# Altium PCB RX_BA_v4.PcbDoc
Units mm, origin at the board's own origin, x right, y up, seen from the top; angles counter-clockwise.
Board outline 80 x 60 mm, 2 copper layers (Top Layer, Bottom Layer), stack 1.671 mm thick; 175 components, 81 nets, 394 pads, 12 vias.
Unrouted connection lines stored in the file: 2.
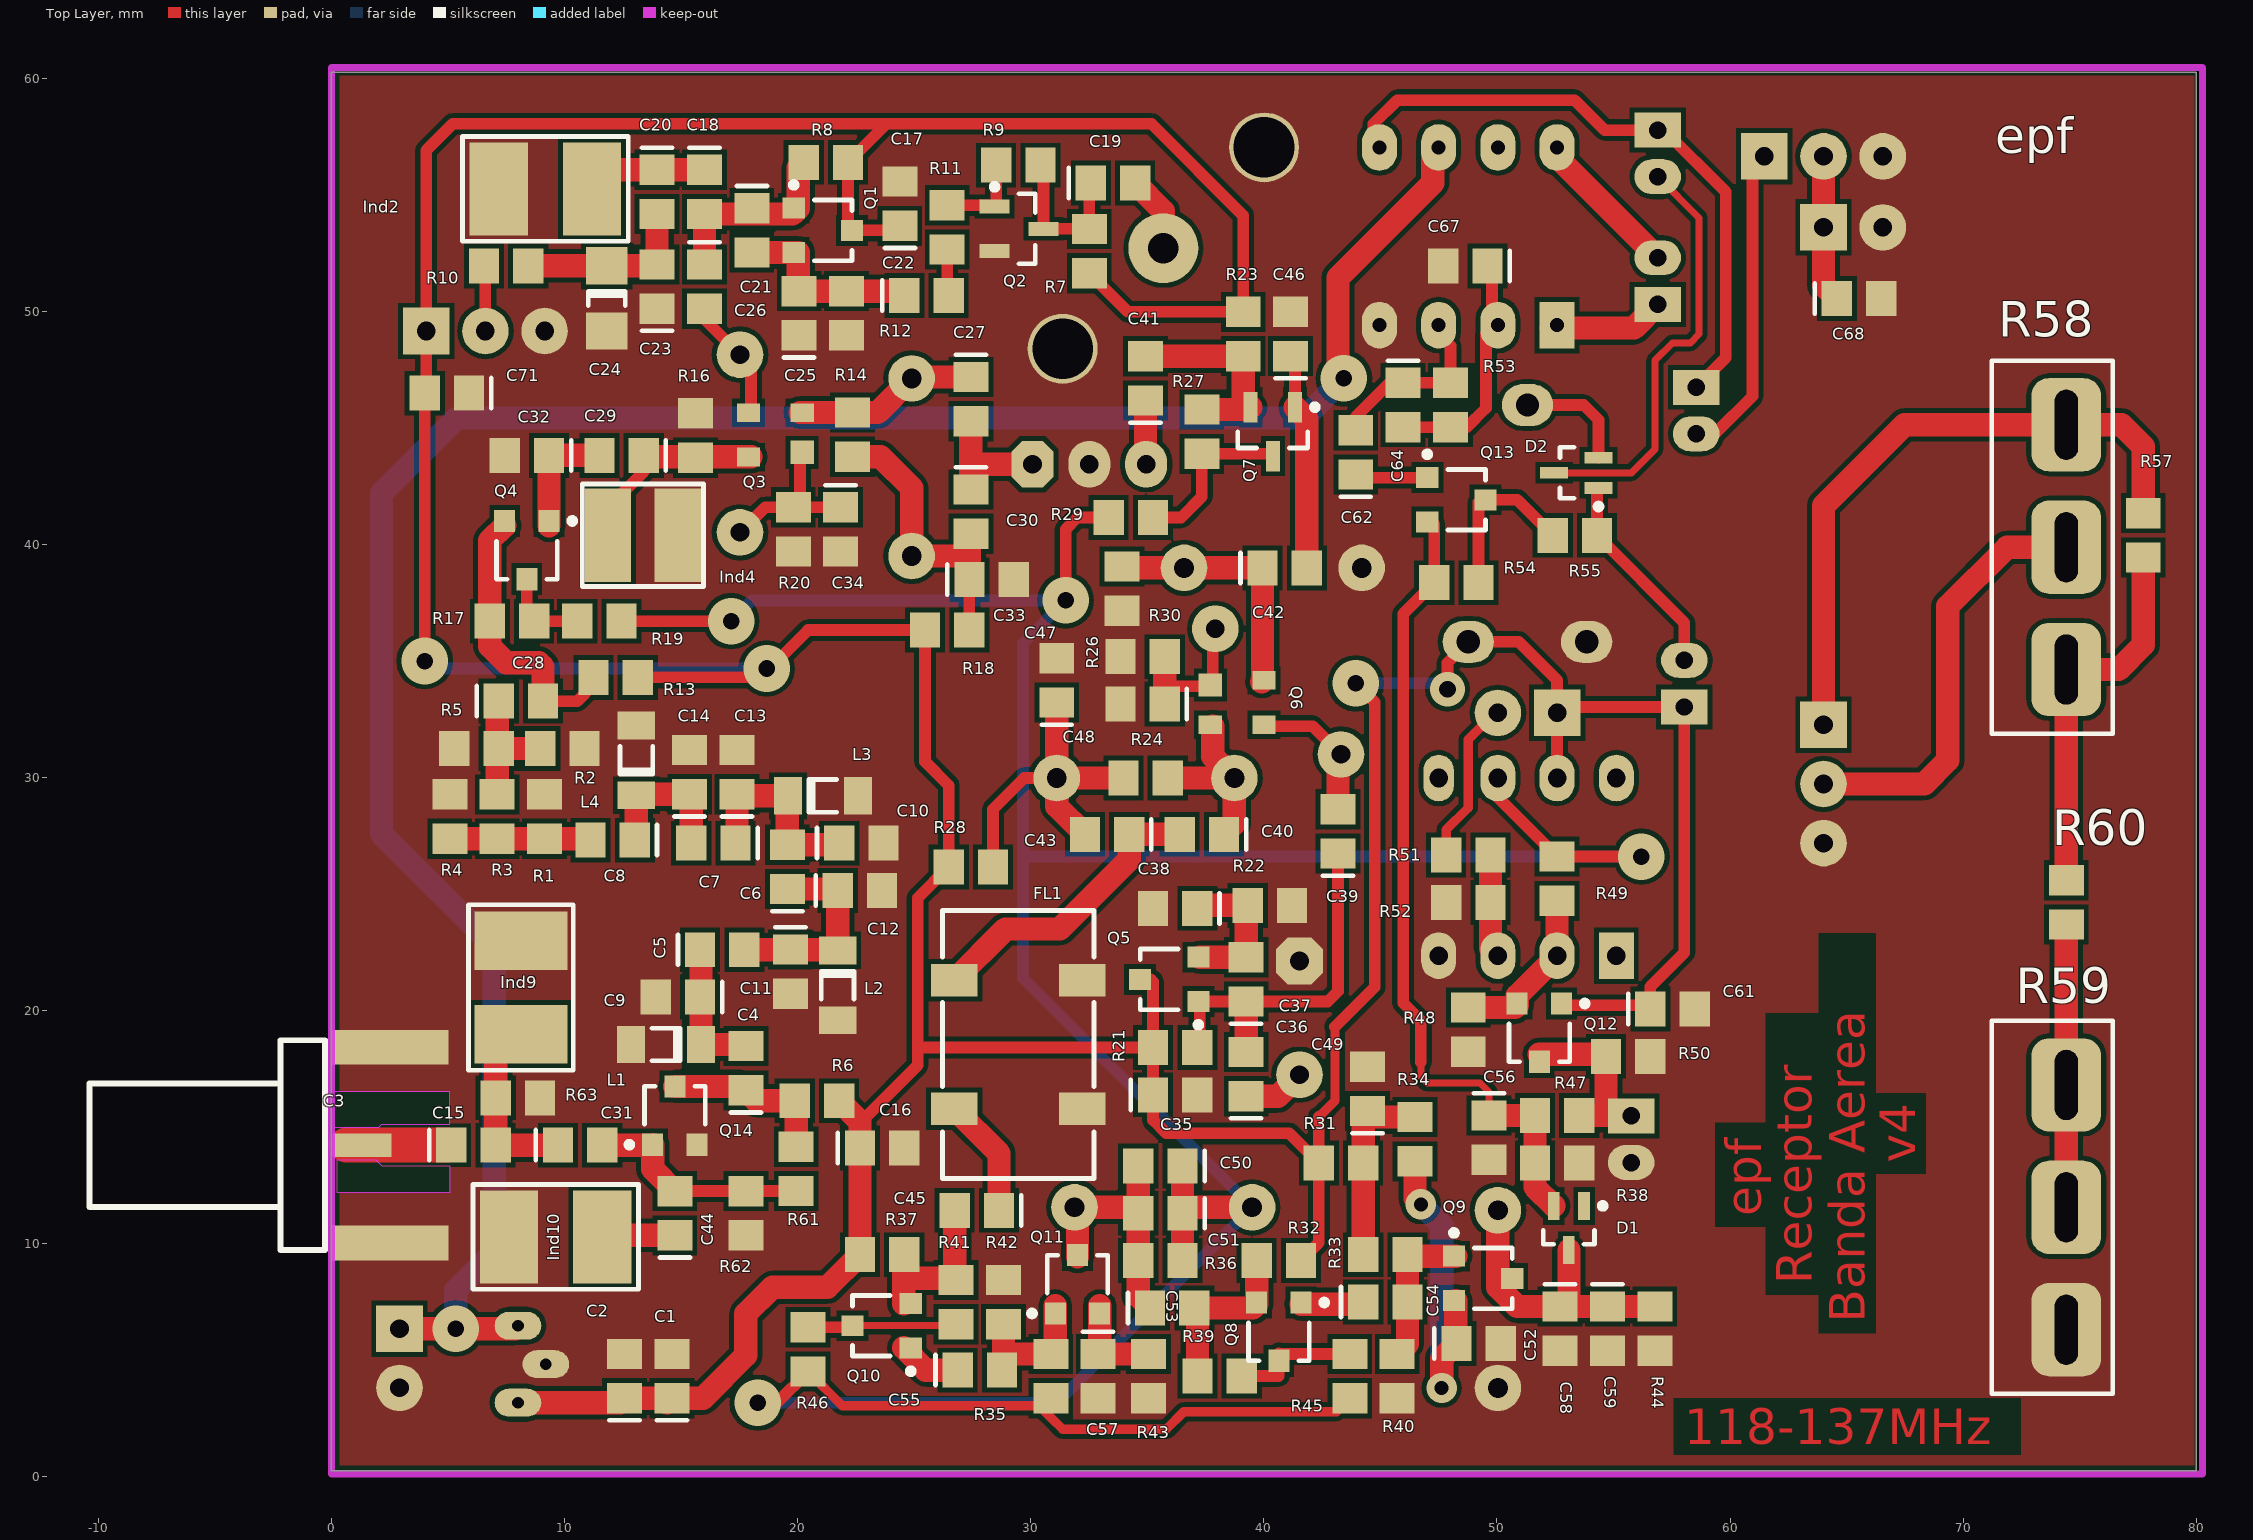
[diagram p0: Top Layer view]
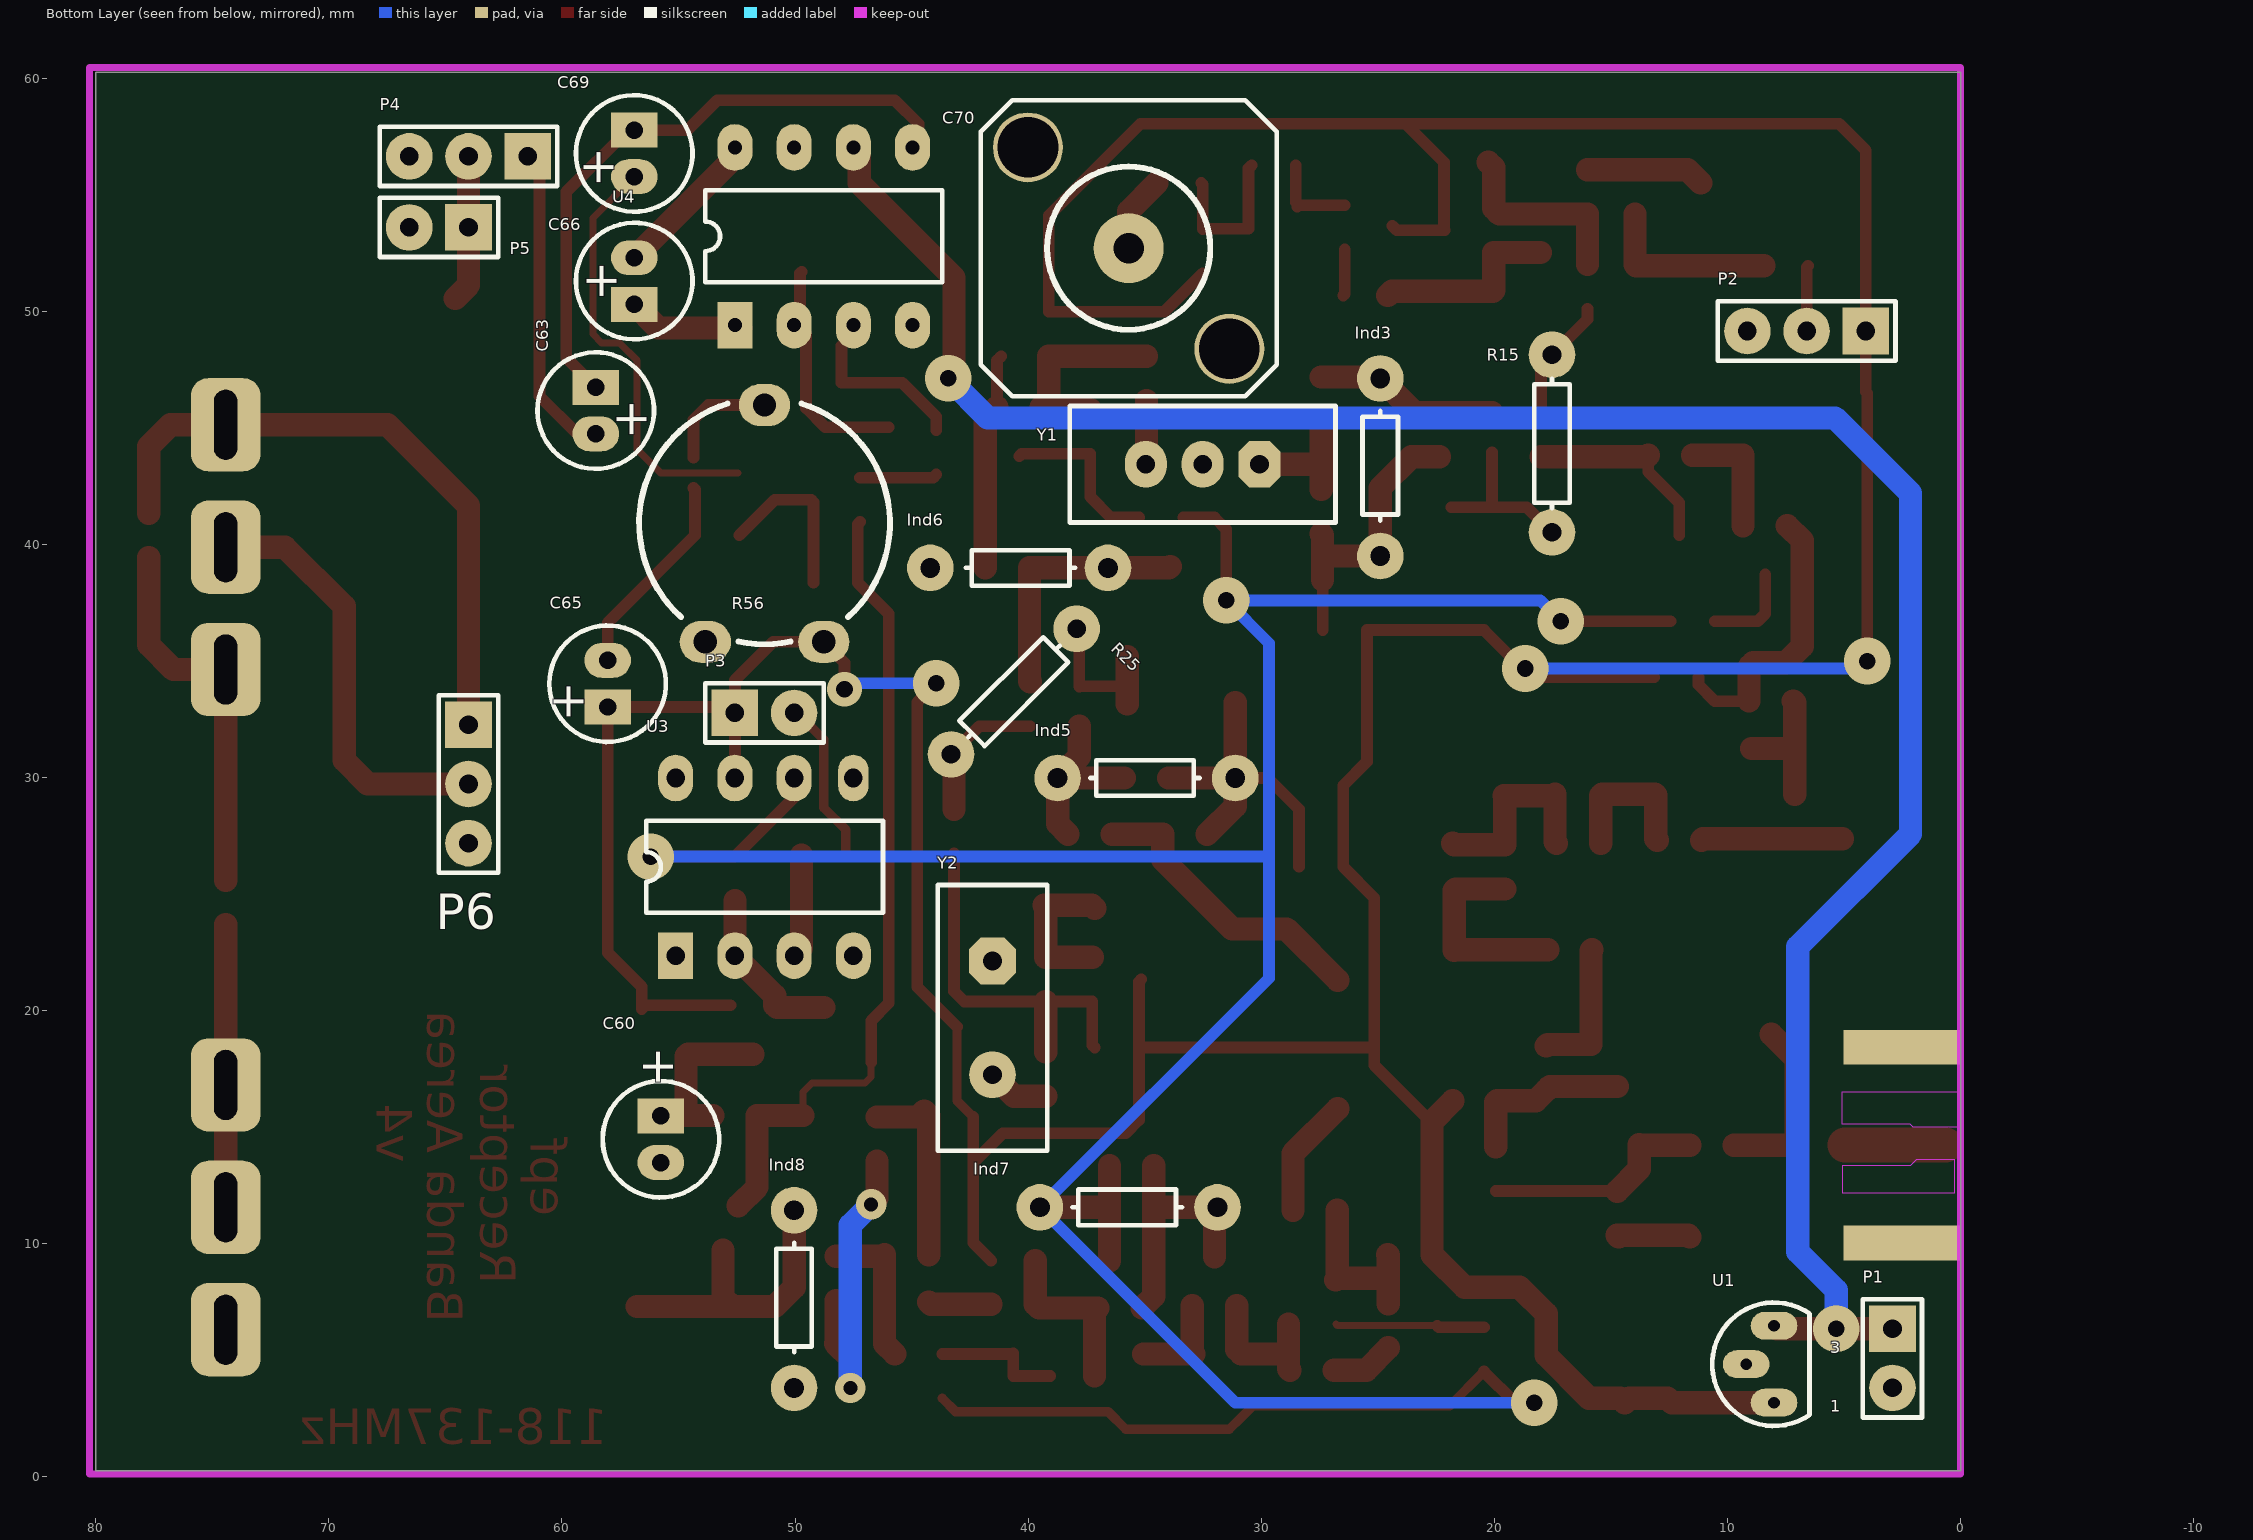
[diagram p1: Bottom Layer view, seen from below]

## Layer stack, top to bottom
Top Layer: signal copper 0.0356
Dielectric: core 1.6, FR-4, Dk 4.8
Bottom Layer: signal copper 0.0356

## Board outline
0,0.254 80,0.254 80,60.254 0,60.254

## Design rules (kind name [scope] priority, off if disabled: settings)
Clearance [All] p1: gap=0.2
ComponentClearance ComponentClearance_2 [OnMechanical] p1: gap=0 collisioncheckmode=3 verticalgap=0 showdistances=TRUE
ComponentClearance ComponentClearance_1 [(OnLayer('Bottom Layer'))] p2: gap=0 collisioncheckmode=3 verticalgap=0 showdistances=TRUE
ComponentClearance [All] p3: gap=0.1 collisioncheckmode=3 verticalgap=0.254 showdistances=TRUE
HoleSize [All] p1: absolutevalues=TRUE maxlimit=5 minlimit=0.025 maxpercent=80.000 minpercent=20.000
PolygonConnect [All] p1: connectstyle=Direct reliefconductorwidth=0.254 reliefentries=4 polygonreliefangle="90 Angle"
RoomDefinition Control_Freq [InComponentClass('Control_Freq')] p1: confinementstyle=ConfineIn formatcopy=TRUE lockcomponents=TRUE outline 61.849,-8.509 141.097,-8.509 141.097,57.404 61.849,57.404
RoomDefinition Mezclador2 [InComponentClass('Mezclador2')] p2: confinementstyle=ConfineIn formatcopy=TRUE lockcomponents=FALSE outline 24.384,10.033 45.72,10.033 45.72,51.689 24.384,51.689
RoomDefinition Mezclador1 [InComponentClass('Mezclador1')] p3: confinementstyle=ConfineIn formatcopy=TRUE lockcomponents=FALSE outline -0.127,29.972 47.117,29.972 47.117,61.468 -0.127,61.468
RoomDefinition FiltroRF [InComponentClass('FiltroRF')] p4: confinementstyle=ConfineIn formatcopy=TRUE lockcomponents=FALSE outline 27.178,35.306 3.429,35.306 3.429,10.541 27.178,10.541
RoomDefinition AmpliRF [InComponentClass('AmpliRF')] p5: confinementstyle=ConfineIn formatcopy=TRUE lockcomponents=FALSE outline 30.353,-0.254 30.353,29.21 -11.557,29.21 -11.557,-0.254
RoomDefinition Ampli_FI2 [InComponentClass('Ampli_FI2')] p6: confinementstyle=ConfineIn formatcopy=TRUE lockcomponents=FALSE outline 15.621,1.016 60.071,1.016 60.071,50.419 15.621,50.419
RoomDefinition Ampli_audio [InComponentClass('Ampli_audio')] p7: confinementstyle=ConfineIn formatcopy=TRUE lockcomponents=FALSE outline 41.783,30.099 84.963,30.099 84.963,60.579 41.783,60.579
RoomDefinition Alimentacion [InComponentClass('Alimentacion')] p8: confinementstyle=ConfineIn formatcopy=TRUE lockcomponents=TRUE outline 0.889,1.524 16.256,1.524 16.256,9.271 0.889,9.271
RoutingVias [All] p1: holewidth=0.8 width=2 viastyle="Through Hole" minholewidth=0.2 minwidth=1.27 maxholewidth=1 maxwidth=3
SilkToSilkClearance [All] p1: silktosilkclearance=0.1
SilkscreenOverComponentPads [All] p1: minsilkscreentomaskgap=0
SolderMaskExpansion [All] p1: expansion=0.102
TestPointUsage [All] p1: valid=0 allowmultiple=FALSE
Testpoint [All] p1: side=15 testpointundercomponent=TRUE minsize=1.016 maxsize=2.54 preferedsize=1.524 minholesize=0 maxholesize=1.016 preferedholesize=0.813 testpointgrid=0.025 style=1023 order=0123456789
Width [All] p1: maxlimit=3 minlimit=0.2 preferedwidth=1
20 further rules are at their usual default settings.

## Classes and differential pairs
component class Mezclador2: C35 C36 C37 C38 C39 C40 C41 C42 C43 C45 C46 C47 C48 FL1 Ind5 Ind6 Q5 Q6 Q7 R21 R22 R23 R24 R25 R26 R27 R28 R29 R30 Y2
component class Mezclador1: C17 C18 C19 C20 C21 C22 C23 C24 C25 C26 C27 C29 C30 C32 C33 C34 C70 C71 Ind2 Ind3 Ind4 P2 Q1 Q2 Q3 Q4 R7 R8 R9 R10 R11 R12 R13 R14 R15 R16 R17 R18 R19 R20 Y1
component class FiltroRF: C4 C5 C6 C7 C8 C9 C10 C11 C12 C13 C14 C28 L1 L2 L3 L4 R1 R2 R3 R4 R5
component class Ampli_FI2: C49 C50 C51 C52 C53 C54 C55 C56 C57 C58 C59 C60 C61 D1 Ind7 Ind8 P3 Q8 Q9 Q10 Q11 Q12 R31 R32 R33 R34 R35 R36 R37 R38 R39 R40 R41 R42 R43 R44 R45 R46 R47 R48 R49 R50 R51 R52 U3
component class Ampli_audio: C62 C63 C64 C65 C66 C67 C68 C69 D2 P4 P5 Q13 R53 R54 R55 R56 U4
component class Alimentacion: C1 C2 P1 U1
component class Control_Freq: P6 R57 R58 R59 R60
component class AmpliRF: C3 C15 C16 C31 C44 Ind9 Ind10 Q14 R6 R61 R62 R63

## Components (designator, comment, footprint, x,y, rotation, side; value= is the part's Value field where it differs from the comment)
C1 "Cap Pol3" C0805 14.605,4.318 r90 top
C2 "Cap Pol3" C0805 12.573,4.318 r90 top
C3 "SMA" SMA1 -0.127,14.224 r90 top
C4 "Cap Pol3" C0805 17.78,17.526 r90 top
C5 "Cap Pol3" C0805 16.764,22.606 r0 top
C6 "Cap Pol3" C0805 19.558,26.162 r90 top
C7 "Cap Pol3" C0805 16.383,27.178 r180 top
C8 "Cap Pol3" C0805 12.065,27.305 r180 top
C9 "Cap Pol3" C0805 14.859,20.574 r180 top
C10 "Cap Pol3" C0805 22.733,27.178 r0 top
C11 "Cap Pol3" C0805 19.685,21.665 r270 top
C12 "Cap Pol3" C0805 22.672,25.146 r0 top
C13 "Cap Pol3" C0805 17.399,30.226 r90 top
C14 "Cap Pol3" C0805 15.367,30.226 r90 top
C15 "Cap Pol3" C0805 6.096,14.224 r0 top
C16 "Cap Pol3" C0805 23.622,14.097 r0 top
C17 "Cap Pol3" C0805 24.384,54.61 r90 top
C18 "Cap Pol3" C0805 16.002,55.118 r270 top
C19 "Cap Pol3" C0805 33.528,55.499 r0 top
C20 "Cap Pol3" C0805 13.97,55.118 r270 top
C21 "Cap Pol3" C0805 18.034,53.467 r270 top
C22 "Cap Pol3" C0805 25.527,50.673 r0 top
C23 "Cap Pol3" C0805 13.97,51.054 r90 top
C24 "Cap Semi" C1206 11.811,50.546 r270 top
C25 "Cap Pol3" C0805 20.066,49.911 r90 top
C26 "Cap Pol3" C0805 16.002,51.054 r270 top
C27 "Cap Pol3" C0805 27.432,46.228 r270 top
C28 "Cap Pol3" C0805 8.128,33.274 r0 top
C29 "Cap Pol3" C0805 12.446,43.815 r180 top
C30 "Cap Pol3" C0805 27.432,41.402 r270 top
C31 "Cap Pol3" C0805 10.668,14.224 r0 top
C32 "Cap Pol3" C0805 8.382,43.815 r180 top
C33 "Cap Pol3" C0805 28.321,38.481 r0 top
C34 "Cap Pol3" C0805 21.844,40.64 r270 top
C35 "Cap Pol3" C0805 36.195,16.383 r0 top
C36 "Cap Pol3" C0805 39.243,17.272 r90 top
C37 "Cap Pol3" C0805 39.243,21.336 r90 top
C38 "Cap Pol3" C0805 36.195,24.384 r180 top
C39 "Cap Pol3" C0805 43.18,27.686 r90 top
C40 "Cap Pol3" C0805 37.338,27.559 r180 top
C41 "Cap Pol3" C0805 34.925,47.117 r90 top
C42 "Cap Pol3" C0805 40.894,38.989 r0 top
C43 "Cap Pol3" C0805 33.274,27.559 r180 top
C44 "Cap Pol3" C0805 14.732,11.303 r90 top
C45 "Cap Pol3" C0805 27.686,11.43 r180 top
C46 "Cap Pol3" C0805 41.148,49.022 r90 top
C47 "Cap Pol3" C0805 31.115,34.163 r90 top
C48 "Cap Pol3" C0805 34.798,33.147 r180 top
C49 "Cap Pol3" C0805 44.45,16.637 r90 top
C50 "Cap Pol3" C0805 35.56,13.335 r180 top
C51 "Cap Pol3" C0805 35.56,11.303 r180 top
C52 "Cap Pol3" C0805 49.215,5.715 r0 top
C53 "Cap Pol3" C0805 36.068,7.239 r0 top
C54 "Cap Pol3" C0805 45.212,7.493 r0 top
C55 "Cap Pol3" C0805 27.813,4.572 r0 top
C56 "Cap Pol3" C0805 49.657,14.544 r270 top
C57 "Cap Pol3" C0805 32.893,4.318 r270 top
C58 "Cap Pol3" C0805 52.705,6.35 r270 top
C59 "Cap Pol3" C0805 54.737,6.35 r270 top
C60 "Cap Pol1" B 55.753,14.478 r270 bottom
C61 "Cap Pol3" C0805 57.531,20.066 r0 top
C62 "Cap Pol3" C0805 43.942,43.942 r90 top
C63 "Cap Pol1" B 58.547,45.736 r270 bottom
C64 "Cap Pol3" C0805 45.974,45.974 r270 top
C65 "Cap Pol1" B 58.039,34.02 r90 bottom
C66 "Cap Pol1" B 56.896,51.292 r90 bottom
C67 "Cap Pol3" C0805 48.641,51.943 r180 top
C68 "Cap Pol3" C0805 65.532,50.546 r0 top
C69 "Cap Pol1" B 56.896,56.769 r270 bottom
C70 "SMA_2" SMA-2HOLED 35.687,52.705 r0 bottom
C71 "Cap Pol3" C0805 4.953,46.482 r180 top
D1 "BAS70-04W" SOT323_N 53.086,10.668 r270 top
D2 "BAS70-04W" SOT323_N 53.406,43.068 r180 top
FL1 "CFWC455D" CFWC455 29.464,18.542 r0 top
Ind2 "Ind2" IND_4MM 7.176,55.245 r0 top
Ind3 "Ind2" AXIAL-0.3#1 24.892,43.307 r90 bottom
Ind4 "Ind2" IND_3MM 14.859,40.386 r180 top
Ind5 "Ind2" AXIAL-0.3#1 34.925,29.972 r0 bottom
Ind6 "Ind2" AXIAL-0.3#1 40.386,38.989 r180 bottom
Ind7 "Ind2" AXIAL-0.3#1 35.687,11.557 r0 bottom
Ind8 "Ind2" AXIAL-0.3#1 50.038,7.62 r90 bottom
Ind9 "Ind2" IND_4MM 8.128,22.987 r270 top
Ind10 "Ind2" IND_4MM 7.62,10.287 r0 top
L1 "Inductor" 3261 14.351,18.542 r180 top
L2 "Inductor" 3261 21.717,21.082 r270 top
L3 "Inductor" 3261 21.082,29.21 r0 top
L4 "Inductor" 3261 13.081,30.734 r90 top
P1 "Header 2" HDR1X2 2.921,6.35 r270 bottom
P2 "Header 3" HDR1X3 4.064,49.149 r0 bottom
P3 "Header 2" HDR1X2 52.578,32.766 r180 bottom
P4 "Header 3" HDR1X3 61.468,56.642 r0 bottom
P5 "Header 2" HDR1X2 64.008,53.594 r0 bottom
P6 "Header 3" HDR1X3 64.008,32.258 r270 bottom
Q1 "BFS17" SOT-23 21.082,53.467 r270 top
Q2 "BFS17" SOT23_N 29.498,53.533 r0 top
Q3 "BF998" SOT-143 20.193,43.942 r90 top
Q4 "PMBF4391" SOT-23 8.382,39.751 r180 top
Q5 "BFS17" SOT-23 35.941,21.336 r90 top
Q6 "BF998" SOT-143 37.705,33.963 r270 top
Q7 "PMBF4391" SOT23_N 40.386,44.831 r270 top
Q8 "PMBF4391" SOT-23 40.64,6.223 r180 top
Q9 "PMBT2907" SOT-23 49.403,8.509 r270 top
Q10 "PMBF4391" SOT-23 23.602,6.477 r90 top
Q11 "BFS17" SOT-23 32.004,8.255 r0 top
Q12 "PMBF4391" SOT-23 51.816,19.05 r180 top
Q13 "PMBF4391" SOT-23 48.26,41.91 r270 top
Q14 "BFS17" SOT-23 14.732,15.494 r0 top
R1 "Res Semi" 2012[0805] 9.144,28.321 r270 top
R2 "Res Semi" 2012[0805] 9.906,31.242 r180 top
R3 "Res Semi" 2012[0805] 7.112,28.321 r270 top
R4 "Res Semi" 2012[0805] 5.08,28.321 r270 top
R5 "Res Semi" 2012[0805] 6.223,31.242 r0 top
R6 "Res Semi" 2012[0805] 20.828,16.129 r180 top
R7 "Res Semi" 2012[0805] 32.512,52.578 r90 top
R8 "Res Semi" 2012[0805] 21.209,56.388 r0 top
R9 "Res Semi" 2012[0805] 29.464,56.261 r180 top
R10 "Res Semi" 2012[0805] 7.493,51.943 r0 top
R11 "Res Semi" 2012[0805] 26.416,53.594 r270 top
R12 "Res Semi" 2012[0805] 22.098,49.911 r90 top
R13 "Res Semi" 2012[0805] 12.192,34.29 r0 top
R14 "Res Semi" 2012[0805] 22.352,44.704 r90 top
R15 "Res1" AXIAL-0.3#2 17.526,44.323 r90 bottom
R16 "Res Semi" 2012[0805] 15.621,44.665 r270 top
R17 "Res Semi" 2012[0805] 7.747,36.703 r0 top
R18 "Res Semi" 2012[0805] 26.416,36.322 r0 top
R19 "Res Semi" 2012[0805] 11.496,36.703 r0 top
R20 "Res Semi" 2012[0805] 19.812,40.64 r90 top
R21 "Res Semi" 2012[0805] 36.195,18.415 r180 top
R22 "Res Semi" 2012[0805] 40.259,24.511 r180 top
R23 "Res Semi" 2012[0805] 39.116,49.022 r90 top
R24 "Res Semi" 2012[0805] 34.925,29.972 r0 top
R25 "Res1" AXIAL-0.3#2 40.613,33.682 r315 bottom
R26 "Res Semi" 2012[0805] 33.909,38.1 r90 top
R27 "Res Semi" 2012[0805] 37.338,44.831 r270 top
R28 "Res Semi" 2012[0805] 27.432,26.162 r0 top
R29 "Res Semi" 2012[0805] 34.29,41.148 r180 top
R30 "Res Semi" 2012[0805] 34.798,35.179 r0 top
R31 "Res Semi" 2012[0805] 43.307,13.462 r180 top
R32 "Res Semi" 2012[0805] 40.64,9.271 r0 top
R33 "Res Semi" 2012[0805] 45.212,9.525 r0 top
R34 "Res Semi" 2012[0805] 46.482,14.478 r270 top
R35 "Res Semi" 2012[0805] 30.861,4.318 r270 top
R36 "Res Semi" 2012[0805] 35.56,9.271 r0 top
R37 "Res Semi" 2012[0805] 23.622,9.525 r0 top
R38 "Res Semi" 2012[0805] 52.578,13.462 r180 top
R39 "Res Semi" 2012[0805] 38.1,4.318 r0 top
R40 "Res Semi" 2012[0805] 45.72,4.318 r270 top
R41 "Res Semi" 2012[0805] 26.797,7.493 r270 top
R42 "Res Semi" 2012[0805] 28.829,7.493 r270 top
R43 "Res Semi" 2012[0805] 35.052,4.318 r90 top
R44 "Res Semi" 2012[0805] 56.769,6.35 r270 top
R45 "Res Semi" 2012[0805] 43.688,4.318 r270 top
R46 "Res Semi" 2012[0805] 20.447,5.461 r270 top
R47 "Res Semi" 2012[0805] 52.578,15.494 r0 top
R48 "Res Semi" 2012[0805] 48.768,19.177 r90 top
R49 "Res Semi" 2012[0805] 52.578,25.654 r90 top
R50 "Res Semi" 2012[0805] 55.626,18.034 r0 top
R51 "Res Semi" 2012[0805] 48.768,26.67 r0 top
R52 "Res Semi" 2012[0805] 48.768,24.638 r180 top
R53 "Res Semi" 2012[0805] 48.006,45.974 r90 top
R54 "Res Semi" 2012[0805] 48.26,38.354 r0 top
R55 "Res Semi" 2012[0805] 53.34,40.386 r0 top
R56 "Pot" POTENCIOMETRO 51.308,40.894 r180 bottom
R57 "Res Semi" 2012[0805] 77.724,40.386 r90 top
R58 "Pot" POT-eje2 74.422,39.878 r90 top
R59 "Pot" POT-eje2 74.422,11.557 r90 top
R60 "Res Semi" 2012[0805] 74.422,24.638 r90 top
R61 "Res Semi" 2012[0805] 19.939,13.208 r270 top
R62 "Res Semi" 2012[0805] 17.78,11.303 r270 top
R63 "Res Semi" 2012[0805] 8.001,16.256 r0 top
U1 "LM78L05ACZ" BCY-W3 8.001,4.826 r180 bottom
U3 "TL081CP" DIP8#1 55.118,22.352 r90 bottom
U4 "LM386N-1" DIP8#2 52.578,49.403 r90 bottom
Y1 "ECS-35-17-4-3IL" HC-49US 32.512,43.434 r0 bottom
Y2 "ECS-10-13-1" HC-49U 41.529,19.685 r270 bottom

## Footprints (in the part's own frame and the unit in brackets; to place one, negate y for a bottom-side part, rotate by r counter-clockwise, add the part's x,y. Pads: shape width x height; smd on the part's side, far side on the other; paste and mask are expansions set on the pad)
2012[0805] [mm] "Chip Resistor; Body 2.0 x 1.3 mm (LxW typ)"
  rect 1.3x1.5 smd: 1(-0.95,0) 2(0.95,0)
3261 [mm] "3216 Chip; Chip Inductor; Body 3.2 x 1.6 mm (LxW typ)"
  rect 1.2x1.6 smd: 1(-1.5,0) 2(1.5,0)
  silkscreen extent -0.6,-0.7 0.6,0.7
AXIAL-0.3#1 [mm] "Resistor; 2 Leads"
  round 2 hole 0.85: 1(-3.81,0) 2(3.81,0)
  silkscreen extent -2.29,-0.76 2.41,0.76, body extent -4.21,-1.2 4.21,1.2, height 3.19
AXIAL-0.3#2 [mm] "Resistor; 2 Leads"
  round 2 hole 0.8: 1(-3.81,0) 2(3.81,0)
  silkscreen extent -2.77,-0.76 2.77,0.76
B [mm] "Capacitor, Electrolytic, Radial; Body 5 x 6.8 mm (Dia.xH typ); Pin Spacing 2 mm (typ)"
  rect 1.5x2 hole 0.75: 1(-1,0)
  oval 1.5x2 hole 0.75: 2(1,0)
  silkscreen extent -2.5,-2.5 2.5,2.5
BCY-W3 [mm] "TO, Flat Index; 3 In-Line, Axial Leads; Body Dia. 4.8mm; Leads 0.55 x 0.51 mm (max)"
  oval 2x1.2 hole 0.5: 1(0,-1.651) 2(-1.2,0) 3(0,1.651)
  silkscreen extent -2.65,-2.65 1.52,2.65, body extent -2.66,-2.66 1.52,2.66, height 5.33
C0805 [mm] "Chip Capacitor; Body 2.0 x 1.2 mm (LxW typ)"
  rect 1.3x1.5 smd: 1(-0.95,0) 2(0.95,0)
  silkscreen extent -1.9,-0.65 -1.9,0.65
C1206 [mm] "Chip Capacitor; Body 3.2 x 1.6 mm (LxW typ)"
  rect 1.6x1.8 smd: 1(-1.4,0) 2(1.4,0)
  silkscreen extent -0.3,-0.8 0.3,0.8
CFWC455 [mm]
  rect 2x1.4 smd: 1(-2.75,2.75) 2(-2.75,-2.75) 3(2.75,-2.75) 4(2.75,2.75)
  silkscreen extent -3.25,-5.75 3.25,5.75, body extent -3.49,-5.85 3.45,5.85, height 3
DIP8#1 [mm]
  rect 2x1.5 hole 0.8: 1(0,0)
  oval 2x1.5 hole 0.8: 2(0,-2.54) 3(0,-5.08) 4(0,-7.62) 6(7.62,-5.08) 7(7.62,-2.54) 8(7.62,0)
  oval 2x1.3 hole 0.8: 5(7.62,-7.62)
  silkscreen extent 1.84,-8.89 5.78,1.27, body extent -1,-8.94 8.57,1.22, height 5.06
DIP8#2 [mm]
  rect 2x1.5 hole 0.6: 1(0,0)
  oval 2x1.5 hole 0.6: 2(0,-2.54) 3(0,-5.08) 4(0,-7.62) 5(7.62,-7.62) 6(7.62,-5.08) 7(7.62,-2.54) 8(7.62,0)
  silkscreen extent 1.84,-8.89 5.78,1.27, body extent -1,-8.94 8.57,1.22, height 5.06
HC-49U [mm] "Quartz Crystal, Thru-Hole; 2 Leads; Body 11.35 x 4.65 x 13.46 mm (LxWxH max)"
  oct 2x2 hole 0.8: 1(-2.44,0)
  round 2 hole 0.8: 2(2.44,0)
  silkscreen extent -5.7,-2.35 5.7,2.35
HC-49US [mm] "Quartz Crystal, Thru-Hole; 3 Leads; Body 11.35 x 5 x 3.5 mm (LxWxH max)"
  oct 1.8x2 hole 0.8: 1(-2.44,0)
  oval 1.8x2 hole 0.8: 2(0,0) 3(2.44,0)
  silkscreen extent -5.7,-2.5 5.7,2.5
HDR1X2 [mm] "Connector; Header; 2 Position"
  rect 2x2 hole 0.8: 1(0,0)
  round 2 hole 0.8: 2(2.54,0)
  silkscreen extent -1.27,-1.27 3.81,1.27
HDR1X3 [mm] "Connector; Header; 3 Position"
  rect 2x2 hole 0.8: 1(0,0)
  round 2 hole 0.8: 2(2.54,0) 3(5.08,0)
  silkscreen extent -1.27,-1.27 6.35,1.27
IND_3MM [mm]
  rect 2x4 smd: 1(0,0) 2(3,0)
  silkscreen extent -1.1,-2.2 4.1,2.2, body extent -0.2,-1.95 3.2,1.95, height 3.95
IND_4MM [mm]
  rect 2.5x4 smd: 1(0,0) 2(4,0)
  silkscreen extent -1.55,-2.25 5.55,2.25, body extent -0.2,-1.95 4.2,1.95, height 3.95
POT-eje2 [mm]
  rrect50% 4x3 hole 1 slot 3 at 0 deg: 1(-5.25,0) 2(0,0) 3(5.25,0)
  silkscreen extent -8,-2 8,3.2, body extent -13.44,-27.97 13.49,11.91, height 30.96
POTENCIOMETRO [mm]
  oval 2.2x1.8 hole 1: 1(-2.54,-5.08) 2(2.54,-5.08) 3(0,5.08)
  silkscreen extent -5.38,-5.18 5.38,5.14
SMA1 [mm]
  rect 1x2.5 smd: 1(0,-1.45)
  rect 1.5x5 smd: 2(-4.2,-2.65) 4(4.2,-2.65)
  rect 1.5x5 smd far side: 3(-4.2,-2.65) 5(4.2,-2.65)
  silkscreen extent -4.5,0.15 4.5,10.25, body extent -4.5,-5.13 4.5,9.78, height 4.5
SMA-2HOLED [mm]
  round 3 hole 1.3: 1(0,0)
  round 3 hole 2.6: 2(-4.32,4.32) 3(4.32,-4.32)
  silkscreen extent -6.35,-6.35 6.35,6.35, body extent -6.35,-6.35 6.35,6.35, height 9.58
SOT23_N [mm] "SOT23, 3-Leads, Body 2.9x1.3mm, Pitch 0.95mm, Lead Span 2.3mm, IPC Medium Density"
  rect 1.3x0.6 smd: 1(-1.05,0.95) 2(-1.05,-0.95) 3(1.05,0)
  silkscreen extent -1.17,-1.5 0.7,1.92, body extent -0.7,-1.5 0.7,1.5, height 1.1
SOT323_N [mm] "SOT323, 3-Leads, Body 2.0x1.3mm, Pitch 0.65mm, Lead Span 2.1mm, IPC Medium Density"
  rect 1.2x0.5 smd: 1(-0.95,0.65) 2(-0.95,-0.65) 3(0.95,0)
  silkscreen extent -1.07,-1.1 0.7,1.58, body extent -0.7,-1.1 0.7,1.1, height 1.1
SOT-23 [mm] "SOT-23; 3 Leads; Body 3.0 x 2.6 mm, inc. leads (LxW max)"
  rect 0.9x0.95 smd: 1(-0.95,-1.25) 2(0.95,-1.25) 3(0,1.25)
  silkscreen extent -2.07,-1.37 1.3,1.25, body extent -1.5,-1.57 1.5,1.57, height 1.1
SOT-143 [mm]
  rect 1x1 smd: 1(0,0)
  rect 0.8x1 smd: 2(1.7,0) 3(1.7,2.3) 4(-0.2,2.3)
  body extent -0.74,-0.14 2.26,2.36, height 1.1

## Part data
C1 C2 C4 C5 C6 C7 C8 C9 C10 C11 C12 C13 C14 C15 C16 C17 C18 C19 C20 C21 C22 C23 C25 C26 C27 C28 C29 C30 C31 C32 C33 C34 C35 C36 C37 C38 C39 C40 C41 C42 C43 C44 C45 C46 C47 C48 C49 C50 C51 C52 C53 C54 C55 C56 C57 C58 C59 C61 C62 C64 C67 C68 C71: "Polarized Capacitor (Surface Mount)"
C24: "Capacitor (Semiconductor SIM Model)"
C60 C63 C65 C66 C69: "Polarized Capacitor (Radial)"
D1 D2: "Schottky Barrier Double Diode"
FL1: library part CFWC455D3, "Filtro ceramico"
P1 P3 P5: "Header, 2-Pin"
P2 P4 P6: "Header, 3-Pin"
Q1 Q2 Q5 Q11 Q14: "NPN 1 GHz Wideband Transistor"
Q3 Q6: "Silicon N-channel Dual-gate MOSFET"
Q4 Q7 Q8 Q10 Q12 Q13: "N-channel Silicon Junction Field-effect Transistor"
Q9: "PNP Switching Transistor"
R1 R2 R3 R4 R5 R6 R7 R8 R9 R10 R11 R12 R13 R14 R16 R17 R18 R19 R20 R21 R22 R23 R24 R26 R27 R28 R29 R30 R31 R32 R33 R34 R35 R36 R37 R38 R39 R40 R41 R42 R43 R44 R45 R46 R47 R48 R49 R50 R51 R52 R53 R54 R55 R57 R60 R61 R62 R63: "Semiconductor Resistor"
R15 R25: "Resistor"
U1: "3-Terminal Positive Regulators"
U3: "JFET-Input Operational Amplifier"
U4: "Low Voltage Audio Power Amplifier"
Y1: "Crystal Oscillator, 3rd In-Line Lead Version"
Y2: "Crystal Oscillator"

## Via types
v1: diameter 2, hole 0.711, Top Layer to Bottom Layer, 9 vias
v2: diameter 1.3, hole 0.6, Top Layer to Bottom Layer, 2 vias
v3: diameter 1.5, hole 0.711, Top Layer to Bottom Layer, 1 vias

## Nets (pads, with @x,y where several pads share a name; then routed paths per layer and width w, separated by ;. In a path a pad name is that pad's centre, name@x,y a point inside that pad or via, vN(x,y) a via of type N, cw(c..) or ccw(c..) an arc to the next point about the centre after c; other vN are vias at no path point)
AUDIO: C56.1 D1.2 Q13.2 R38.2 R47.1 R54.1 | length 35.1
  Top Layer w0.3: 46.736,17.78 46.736,17.145 46.99,16.891 49.276,16.891 49.657,16.51 C56.1
  Top Layer w0.5: 46.736,17.78 46.736,19.558 45.974,20.32 45.974,37.018 R54.1 47.31,40.86 Q13.2@47.21,40.96
  Top Layer w1: C56.1 R47.1 R38.2 51.628,12.426 D1.2
AVCC: P1.1 U1.3 U4.6 | length 98.4
  Top Layer w1: P1.1 v1(5.334,6.35) 7.874,6.35 U1.3 ; v1@43.18,47.117 43.18,51.435 47.244,55.499 U4.6@47.244,56.896
  Bottom Layer w1: v1(5.334,6.35) 5.334,8.001 6.985,9.652 6.985,22.733 2.15,27.568 2.15,42.184 5.383,45.417 41.734,45.417 v1(43.434,47.117)
CAG: C50.1 C51.1 Ind7.2 R19.2 R29.2 R35.2 R36.2 R45.2 R46.2 R49.2 U3.6 | length 149.7
  Top Layer w0.4: R46.2 21.91,3.048 30.353,3.048 30.861,2.54 31.369,2.032 35.814,2.032 36.576,2.794 43.114,2.794 R45.2
  Top Layer w0.5: R19.2 v1(17.145,36.703) v1@17.526,36.703 ; v1@18.415,3.175 19.111,3.175 R46.2 ; v1(31.496,37.592) 31.496,40.64 32.004,41.148 R29.2 ; U3.6 50.038,29.144 R49.2 v1(56.195,26.604)
  Top Layer w1: R36.2 C51.1 ; C50.1 C51.1 ; Ind7.2 36.764,11.557 C51.1
  Bottom Layer w0.5: v1(17.145,36.703) 18.034,37.592 v1(31.496,37.592) 29.665,35.761 29.665,26.416 ; v1(18.288,3.175) 31.115,3.175 Ind7.2 29.665,21.389 29.665,26.416 ; v1(56.195,26.604) 29.853,26.604 29.665,26.416
FI1: C41.1 Y1.3 | length 2.7
  Top Layer w1: C41.1 34.925,43.461 Y1.3
FI2: C45.2 Q10.2 R37.2 R41.1 | length 7.3
  Top Layer w1: Q10.2@24.545,7.427 24.545,8.509 ; R37.2 24.545,9.498 24.545,8.509 ; R41.1@26.736,8.504 C45.2 ; R41.1 26.731,8.509 24.545,8.509
GND: C1.2 C2.2 C3.2 C3.3 C3.4 C3.5 C9.2 C10.2 C11.2 C12.2 C13.2 C14.2 C16.2 C17.2 C23.1 C24.2 C25.1 C32.2 C33.2 C34.2 C35.2 C38.2 C46.2 C47.2 C48.2 C49.2 C52.2 C56.2 C57.2 C58.2 C59.2 C60.2 C61.2 C67.2 C68.2 C70.2 C70.3 C71.1 FL1.3 FL1.4 Ind2.1 Ind4.1 Ind6.1 Ind8.1 Ind9.1 Ind10.1 L1.2 L2.2 L3.2 L4.2 P1.2 P2.3 P4.3 P5.2 P6.3 Q2.2 Q14.2 R1.1 R2.1 R4.1 R5.1 R12.1 R16.1 R20.1 R22.1 R26.1 R30.1 R38.1 R40.2 R42.1 R43.1 R44.2 R48.1 R50.2 R52.2 R56.1 R59.1 R62.2 R63.2 U1.2 U3.4 U4.4 Y1.2 Y2.1
MIXER_OUT: C27.2 C30.1 Y1.1 | length 5.6
  Top Layer w1: C30.1 27.432,43.434 ; C27.2 27.432,43.434 ; Y1.1 27.432,43.434
NetC3_1: C3.1 C15.1 | length 4.3
  Top Layer w1.5: C3.1@0.635,14.224 C15.1@4.953,14.224
NetC4_2: C4.2 C5.1 C9.1 L1.1 | length 6
  Top Layer w1: C5.1 15.851,22.569 L1.1 17.714,18.542 C4.2
NetC5_2: C5.2 C6.1 C11.1 C12.1 L2.1 | length 8.8
  Top Layer w1: C5.2 21.693,22.606 L2.1 21.717,25.141 C12.1 21.656,25.212 C6.1
NetC6_2: C6.2 C7.1 C10.1 C13.1 L3.1 | length 8.7
  Top Layer w1: C7.1 17.399,27.244 C13.1 17.465,29.21 L3.1 19.558,29.186 C6.2 21.717,27.112 C10.1
NetC7_2: C7.2 C8.1 C14.1 L4.1 | length 6.4
  Top Layer w1: C8.1 13.081,27.371 L4.1 13.123,29.276 C14.1 15.433,29.21 C7.2
NetC8_2: C8.2 R1.2 R3.2 R4.2 | length 6.1
  Top Layer w1: R4.2 R3.2 R1.2 11.049,27.371 C8.2
NetC15_2: C15.2 C31.1 Ind9.2 R63.1 | length 7.9
  Top Layer w1: Ind9.2 7.046,17.905 C15.2 C31.1
NetC18_1: C18.1 C20.1 Ind2.2 | length 5.1
  Top Layer w1: Ind2.2@11.144,55.499 11.713,56.068 C20.1 C18.1
NetC19_1: C19.1 Q2.3 R7.2 R9.1 | length 6.7
  Top Layer w0.5: R9.1 30.548,56.127 Q2.3 32.507,53.533 R7.2 32.512,55.433 C19.1
NetC20_2: C20.2 C23.2 C24.1 R10.2 | length 7.7
  Top Layer w1: R10.2 13.909,51.943 C23.2 C20.2
NetC21_2: C21.2 C22.1 C25.2 Q1.2 R12.2 | length 8.5
  Top Layer w0.5: R12.2 R12.2@22.286,50.673
  Top Layer w1: C21.2 20.032,52.517 20.032,50.895 C25.2 R12.2 24.389,50.861 C22.1
NetC22_2: C22.2 R11.2 | length 2
  Top Layer w0.5: R11.2 26.416,50.734 C22.2
NetC26_2: C26.2 Q3.3 R15.2 | length 5.3
  Top Layer w0.5: C26.2 16.002,49.657 R15.2 18,47.659 Q3.3@18,45.654
NetC27_1: C27.1 Ind3.2 Q3.2 R14.2 | length 8
  Top Layer w1: Q3.2@20.1,45.654 23.429,45.654 Ind3.2 24.953,47.178 C27.1
NetC28_1: C28.1 R2.2 R3.1 R5.2 | length 5.9
  Top Layer w1: R3.1 7.112,33.208 C28.1 ; R5.2@7.112,31.181 R5.2 R2.2
NetC29_1: C29.1 Ind4.2 Q3.4 R16.2 | length 8.6
  Top Layer w0.5: Ind4.2@12.065,40.386 12.065,41.783 13.396,43.114 C29.1
  Top Layer w1: C29.1 13.457,43.754 Q3.4@18,43.754
NetC30_2: C30.2 C33.1 Ind3.1 R14.1 R18.2 | length 12.6
  Top Layer w0.5: R18.2 27.366,38.476 C33.1
  Top Layer w1: R14.1 23.556,43.754 24.892,42.418 Ind3.1 27.366,39.497 ; C33.1 27.371,40.391 C30.2
NetC31_2: C31.2 C44.2 Q14.1 R61.2 R62.1 | length 9.8
  Top Layer w0.5: C44.2 14.737,12.258 R61.2
  Top Layer w1: C31.2 13.762,14.224 Q14.1 13.782,13.203 C44.2
NetC34_1: C34.1 Q3.1 R15.1 R20.2 | length 7.1
  Top Layer w0.5: R15.1 18.603,41.59 R20.2 R20.2@20.066,41.59 ; Q3.1@20.1,43.954 20.1,41.624 R20.2@20.066,41.59 ; C34.1 R20.2@20.066,41.59
NetC36_1: C36.1 Y2.2 | length 2.7
  Top Layer w1: C36.1 40.606,16.322 Y2.2
NetC36_2: C36.2 C37.1 C39.1 Q5.1 R21.1 | length 16.2
  Top Layer w0.5: R21.1 37.245,18.515 37.245,20.386 C37.1 42.738,20.386 43.18,20.828 C39.1
  Top Layer w1: C36.2 C37.1
NetC37_2: C37.2 C38.1 Q5.2 R22.2 | length 6.5
  Top Layer w0.5: R22.2@39.243,24.445 R22.2
  Top Layer w1: C38.1 37.272,24.511 R22.2 ; Q5.2@37.245,22.286 C37.2 R22.2@39.243,24.445
NetC39_2: C39.2 Q6.3 R25.2 | length 6.3
  Top Layer w0.5: Q6.3@39.912,32.197 42.098,32.197 R25.2
  Top Layer w1: C39.2 43.18,30.861 R25.2
NetC40_1: C40.1 Ind5.2 Q6.2 R24.2 | length 8.1
  Top Layer w1: R24.2 Ind5.2 ; Q6.2@37.812,32.197 37.812,30.895 Ind5.2 ; C40.1 38.735,28.006 Ind5.2
NetC40_2: C40.2 C43.1 FL1.1 | length 12.9
  Top Layer w1: FL1.1 28.917,23.495 31.242,23.495 34.224,26.477 C43.1 C40.2
NetC41_2: C41.2 Q7.2 R23.1 R27.1 | length 8.7
  Top Layer w1: C41.2 39.111,48.067 R23.1 39.116,46.201 Q7.2 39.336,45.781 R27.1
NetC42_1: C42.1 Ind6.2 Q6.4 R26.2 | length 11
  Top Layer w1: R26.2 33.97,38.989 Ind6.2 C42.1 39.944,34.129 Q6.4@39.912,34.097
NetC42_2: C42.2 C46.1 Q7.1 | length 9.4
  Top Layer w0.5: C46.1 41.336,47.884 Q7.1
  Top Layer w1: Q7.1 41.844,45.373 C42.2
NetC43_2: C43.2 C47.1 Ind5.1 R24.1 R28.2 | length 14.8
  Top Layer w0.5: R28.2 28.382,28.636 29.718,29.972 Ind5.1
  Top Layer w1: C47.1 Ind5.1 ; C43.2 31.115,28.768 Ind5.1 ; R24.1 Ind5.1
NetC44_1: C44.1 Ind10.2 | length 3.2
  Top Layer w1: Ind10.2 11.686,10.353 C44.1 C44.1@14.666,10.287
NetC45_1: C45.1 FL1.2 | length 5.2
  Top Layer w1: FL1.2 28.636,13.87 C45.1
NetC48_1: C48.1 Q6.1 R25.1 R30.2 | length 6.6
  Top Layer w0.5: 35.748,33.909 37.8,33.909 37.812,33.897 37.812,36.269 R25.1
  Top Layer w1: C48.1 35.748,33.909 R30.2
NetC49_1: C49.1 R31.1 R33.1 R34.1 | length 8.4
  Top Layer w1: R33.1 44.262,13.457 R31.1 44.257,15.494 C49.1 44.709,15.428 R34.1
NetC50_2: C50.2 C51.2 C53.1 Ind7.1 Q11.3 R36.1 | length 11.3
  Top Layer w1: Q11.3@32.004,9.432 32.004,11.43 Ind7.1 34.356,11.557 C51.2 ; C50.2 C51.2 ; C53.1 34.61,7.747 R36.1 C51.2
NetC52_1: C52.1 Q9.2 R34.2 | length 14.2
  Top Layer w1: R34.2 46.482,11.938 v2(46.736,11.684) ; v2(47.625,3.81) 47.625,5.075 C52.1 48.226,5.754 Q9.2@48.226,7.559
  Bottom Layer w1: v2(46.736,11.684) 47.625,10.795 v2(47.625,3.81)
NetC53_2: C53.2 Q8.2 R32.1 R39.1 | length 7.6
  Top Layer w1: R39.1 37.15,7.107 C53.2 39.529,7.239 39.69,7.4 R32.1
NetC54_1: C54.1 Q8.1 | length 2.7
  Top Layer w1: Q8.1@41.59,7.4 44.169,7.4 C54.1
NetC54_2: C54.2 Q9.1 R33.2 R40.1 | length 6.5
  Top Layer w1: R40.1 46.162,5.71 C54.2 R33.2 46.228,9.459 Q9.1@48.226,9.459
NetC55_1: C55.1 Q10.1 | length 2.7
  Top Layer w1: Q10.1@24.545,5.527 25.5,4.572 C55.1
NetC55_2: C55.2 Q11.1 R35.1 R42.2 | length 6.2
  Top Layer w1: C55.2 28.829,4.638 28.829,5.334 ; R42.2 28.829,5.334 ; Q11.1@31.054,7.332 31.054,5.461 R35.1 28.895,5.268 28.829,5.334
NetC57_1: C57.1 Q11.2 R43.2 | length 4.2
  Top Layer w1: Q11.2@32.954,7.332 32.954,5.329 C57.1 R43.2
NetC58_1: C58.1 C59.1 D1.3 Ind8.2 Q9.3 R44.1 | length 13
  Top Layer w1: Ind8.2 50.038,8.128 50.866,7.3 C58.1 ; D1.3 53.086,7.681 C58.1 ; R44.1 C59.1 C58.1
NetC60_1: C60.1 Q12.3 R47.2 R50.1 | length 7.7
  Top Layer w1: Q12.3@51.816,18.127 54.583,18.127 R50.1 54.676,15.56 54.61,15.494 ; R47.2 54.61,15.494 ; C60.1 55.737,15.494 54.61,15.494
NetC62_1: C62.1 Q13.1 | length 3.3
  Top Layer w0.5: C62.1 44.074,42.86 Q13.1@47.21,42.86
NetC62_2: C62.2 C64.1 R53.2 U4.3 | length 7.9
  Top Layer w0.5: C62.2 43.942,45.466 45.4,46.924 C64.1 R53.2 48.006,48.514 U4.3@47.244,49.276
NetC63_1: C63.1 C69.1 U4.5 | length 27.2
  Top Layer w0.5: U4.5@44.704,56.896 44.704,58.039 45.72,59.055 53.34,59.055 54.626,57.769 C69.1 57.166,57.769 59.817,55.118 59.817,48.006 C63.1
NetC63_2: C63.2 P4.1 | length 13.6
  Top Layer w0.5: C63.2 59.341,44.736 60.96,46.355 60.96,56.134 P4.1
NetC64_2: C64.2 C67.1 R53.1 U4.2 | length 9.9
  Top Layer w0.5: C64.2 R53.1 48.707,45.024 49.53,45.847 49.53,49.022 49.784,49.276 49.784,51.623 C67.1@49.718,51.689
NetC65_2: C65.2 D2.1 R55.2 | length 9
  Top Layer w0.5: D2.1 54.29,42.352 R55.2 58.039,36.637 C65.2
NetC66_1: C66.1 U4.1 | length 5
  Top Layer w1: U4.1@52.324,49.276 55.88,49.276 C66.1
NetC66_2: C66.2 U4.8 | length 6.5
  Top Layer w1: U4.8@52.324,56.896 52.324,56.864 C66.2
NetC68_1: C68.1 P4.2 P5.1 | length 6.3
  Top Layer w1: P4.2 P5.1 64.008,51.12 C68.1
NetC69_2: C69.2 D2.3 | length 18.4
  Top Layer w0.3: D2.3 55.768,43.068 56.769,44.069 56.769,47.879 57.531,48.641 58.293,48.641 58.674,49.022 58.674,53.991 C69.2
NetD2_2: D2.2 R56.3 | length 4.9
  Top Layer w0.5: R56.3 53.721,45.974 54.356,45.339 D2.2
NetP2_2: P2.2 R10.1 | length 2.8
  Top Layer w0.5: R10.1 6.604,51.882 P2.2
NetP3_2: P3.2 R51.1 | length 7.1
  Top Layer w0.4: R51.1 47.818,27.752 48.768,28.702 48.768,31.623 49.911,32.766 P3.2
NetP6_1: P6.1 R57.2 R58.3 | length 27.8
  Top Layer w1: P6.1 64.008,41.656 67.48,45.128 R58.3 76.792,45.128 77.724,44.196 R57.2
NetP6_2: P6.2 R58.2 | length 18.5
  Top Layer w1: P6.2 68.326,29.718 69.342,30.734 69.342,37.338 71.882,39.878 R58.2
NetQ2_1: Q2.1 R9.2 R11.1 | length 3.8
  Top Layer w0.5: R11.1 Q2.1@28.387,54.544 ; Q2.1 Q2.1@28.387,54.544 ; R9.2 28.514,54.671 Q2.1@28.387,54.544
NetQ4_3: Q4.3 R17.2 R19.1 | length 4
  Top Layer w0.5: Q4.3@8.382,38.701 8.382,37.018 R17.2 R19.1
NetQ7_3: Q7.3 R27.2 R29.1 | length 7.4
  Top Layer w0.5: R29.1 36.449,41.148 37.338,42.037 R27.2 40.286,43.881 Q7.3
NetQ8_3: Q8.3 R39.2 R45.1 | length 5.6
  Top Layer w0.5: R39.2 40.64,4.318 40.64,5.3 40.672,5.268 R45.1
NetQ10_3: Q10.3 R41.2 R46.1 | length 6.4
  Top Layer w0.3: Q10.3@22.445,6.477 26.731,6.477 R41.2
  Top Layer w0.5: R46.1 22.379,6.411 Q10.3@22.445,6.477
NetQ12_2: Q12.2 R48.2 R49.1 U3.2 | length 7.3
  Top Layer w1: R48.2 50.766,20.127 50.866,20.227 50.866,20.64 U3.2 R49.1
NetQ13_3: Q13.3 R54.2 R55.1 | length 7.3
  Top Layer w0.5: R54.2 49.21,41.81 49.31,41.91 50.866,41.91 R55.1
NetR51_2: R51.2 R52.1 U3.3 | length 4.5
  Top Layer w1: R51.2 R52.1 49.718,22.672 U3.3
NetR57_1: R57.1 R58.1 R60.2 | length 16.5
  Top Layer w1: R60.2 R58.1 76.665,34.628 77.724,35.687 R57.1
NetR59_2: R59.2 R59.3 R60.1 | length 12.1
  Top Layer w1: R59.2 R60.1
OL: C18.2 C21.1 C26.1 Q1.1 R8.1 | length 8.4
  Top Layer w1: C26.1 C18.2 19.783,54.168 20.032,54.417 20.032,56.161 R8.1
PLL: C19.2 C70.1 | length 3.3
  Top Layer w1: C19.2 35.687,54.29 C70.1
RF: C29.2 C32.1 Q4.1 | length 5.2
  Top Layer w1: Q4.1@9.332,40.801 C32.1 C29.2
RF_AMP: C28.2 Q4.2 R13.1 R17.1 | length 12.3
  Top Layer w0.5: C28.2 10.541,33.274 11.242,33.975 R13.1
  Top Layer w1: Q4.2@7.432,40.801 6.797,40.166 R17.1 6.797,35.621 7.493,34.925 8.89,34.925 9.078,34.737 C28.2
RF_FILT: C4.1 Q14.3 R6.2 R61.1 | length 7.4
  Top Layer w1: Q14.3 17.612,16.744 C4.1 18.227,16.129 R6.2 19.939,16.068 R61.1
VCC: C1.1 C2.1 C16.1 C17.1 C35.1 C61.1 C65.1 C71.2 P2.1 P3.1 Q1.3 Q5.3 Q12.1 R6.1 R7.1 R8.2 R13.2 R18.1 R21.2 R23.2 R28.1 R31.2 R32.2 R37.1 R56.2 U1.1 U3.7 | length 244.5
  Top Layer w0.4: 42.357,15.433 43.053,16.129 43.053,19.304
  Top Layer w0.5: v1(4.003,34.991) C71.2 4.064,46.543 P2.1 4.064,56.896 5.207,58.039 23.81,58.039 ; R13.2 18.288,34.29 v1(18.669,34.671) ; v1@18.288,34.163 20.447,36.322 R18.1 25.466,30.668 26.482,29.652 26.482,28.194 R28.1 25.146,24.826 25.146,18.415 ; 22.672,15.235 22.728,15.235 25.146,17.653 25.146,18.415 ; C17.1 24.191,53.467 22.132,53.467 22.159,53.494 R8.2 23.81,58.039 ; R7.1 34.168,49.972 R23.2 39.116,54.102 35.179,58.039 23.81,58.039 ; Q5.3@35.145,21.336 35.245,21.236 R21.2 ; R32.2 42.357,10.038 R31.2 ; 42.357,15.433 R31.2 ; 43.053,19.304 44.757,21.008 44.757,33.221 v1(43.942,34.036) ; v3(47.879,33.782) 47.879,34.925 R56.2 50.927,35.814 52.578,34.163 P3.1 ; U3.7 P3.1 ; Q12.1@52.766,20.227 56.42,20.227 C61.1 56.581,21.021 58.039,22.479 C65.1 52.832,33.02 P3.1 ; 25.146,18.415 R21.2 ; R21.2 C35.1 35.245,15.301 35.814,14.732 41.087,14.732 R31.2
  Top Layer w1: U1.1 12.38,3.175 C2.1 14.219,3.368 14.412,3.175 C1.1 15.941,3.368 17.78,5.207 17.78,6.985 18.923,8.128 21.275,8.128 R37.1 22.672,15.235 R6.1
  Bottom Layer w0.5: v1(4.003,34.991) 3.683,34.671 v1(18.669,34.671) ; v1(43.942,34.036) 47.625,34.036 v3(47.879,33.782)
pads on no net: D1.1 U3.1 U3.5 U3.8 U4.7

## Polygon pours and split planes (outlines as drawn)
GND on Top Layer "GND" (solid, remove dead copper, pour order 1000): 81.153,61.595 80.899,61.849 -1.016,61.849 -1.016,-0.762 -0.508,-1.27 0.254,-0.508 81.28,-0.508

## Keep-outs
Keep-Out Layer:
  pour cut-out: 5.08,15.113 5.08,16.51 0.127,16.51 0.127,14.986 2.032,14.986 2.159,15.113
  pour cut-out: 0.254,13.589 1.905,13.589 2.159,13.335 5.08,13.335 5.08,12.192 0.254,12.192
  lines w0.3: 0,0.127 0,60.452 80.264,60.452 80.264,0.127 0,0.127

## Other copper
Top Layer:
  text "v4" at 67.945,13.462 h1.52 r90
  text "epf" at 61.341,11.176 h1.52 r90
  text "Receptor" at 63.5,8.255 h1.52 r90
  text "Banda Aerea" at 65.786,6.604 h1.52 r90
  text "118-137MHz" at 58.039,1.397 h1.52

## Silkscreen, mask and mechanical layers (free items; w line width, h text height)
Top Overlay:
  text "epf" at 71.374,56.769 h1.52
Drill Drawing:
  text ".LEGEND" at 85.08,5.334 h1.52
  text "Drill Drawing." at 85.08,2.794 h1.52

## Dimensions
0,0.127 to 0,60.452 on Mechanical 1
0,0.127 to 80.264,0.127 on Mechanical 1

## Text inside footprints (layer, text, board x,y; h text height)
C60: Bottom Overlay "+" at 56.503,18.453 h1.5 r90
C63: Bottom Overlay "+" at 57.658,46.228 h1.5 r90
C65: Bottom Overlay "+" at 59.055,32.385 h1.5 r270
C66: Bottom Overlay "+" at 57.658,50.419 h1.5 r270
C69: Bottom Overlay "+" at 59.055,57.023 h1.5 r90
U1: Bottom Overlay "3" at 5.58,5.293 h0.5; Bottom Overlay "1" at 5.588,2.794 h0.5